# EAGLE board Q Tessel Panel (EAGLE 7.7.0)
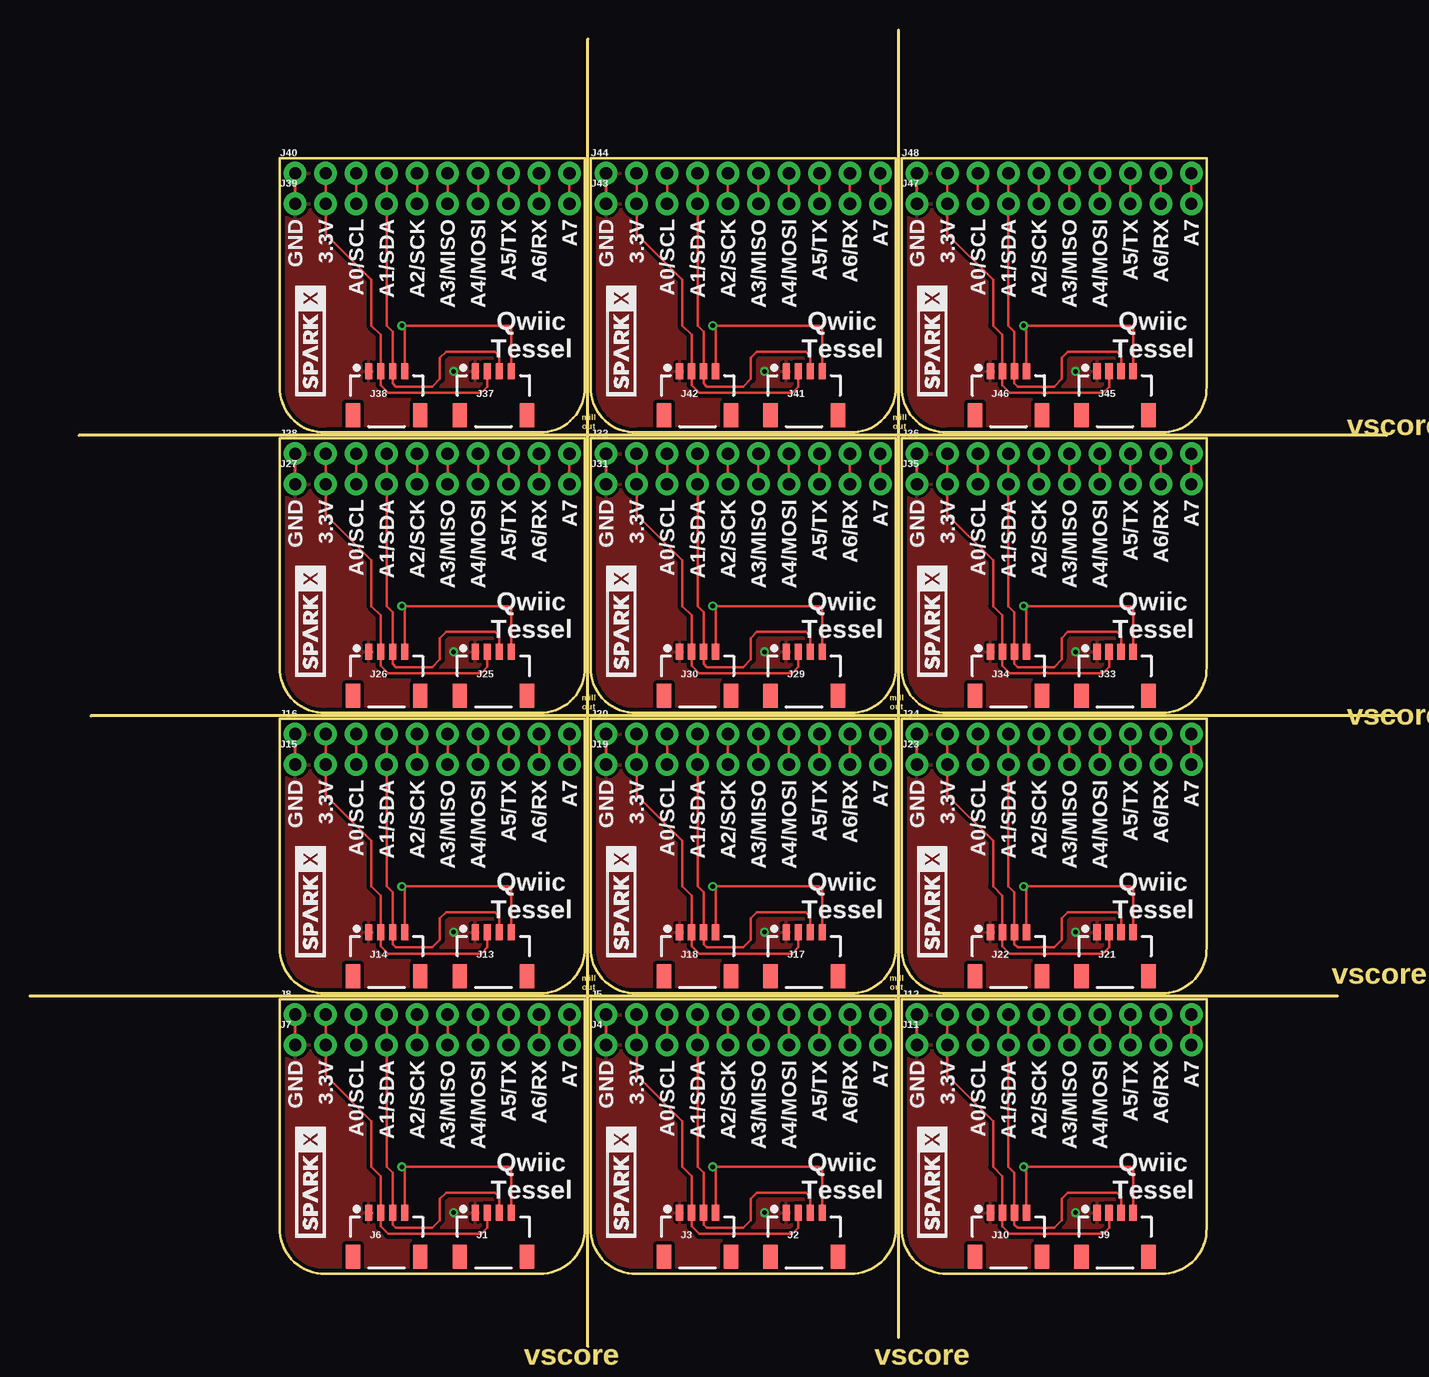
[diagram p0: board, top side]
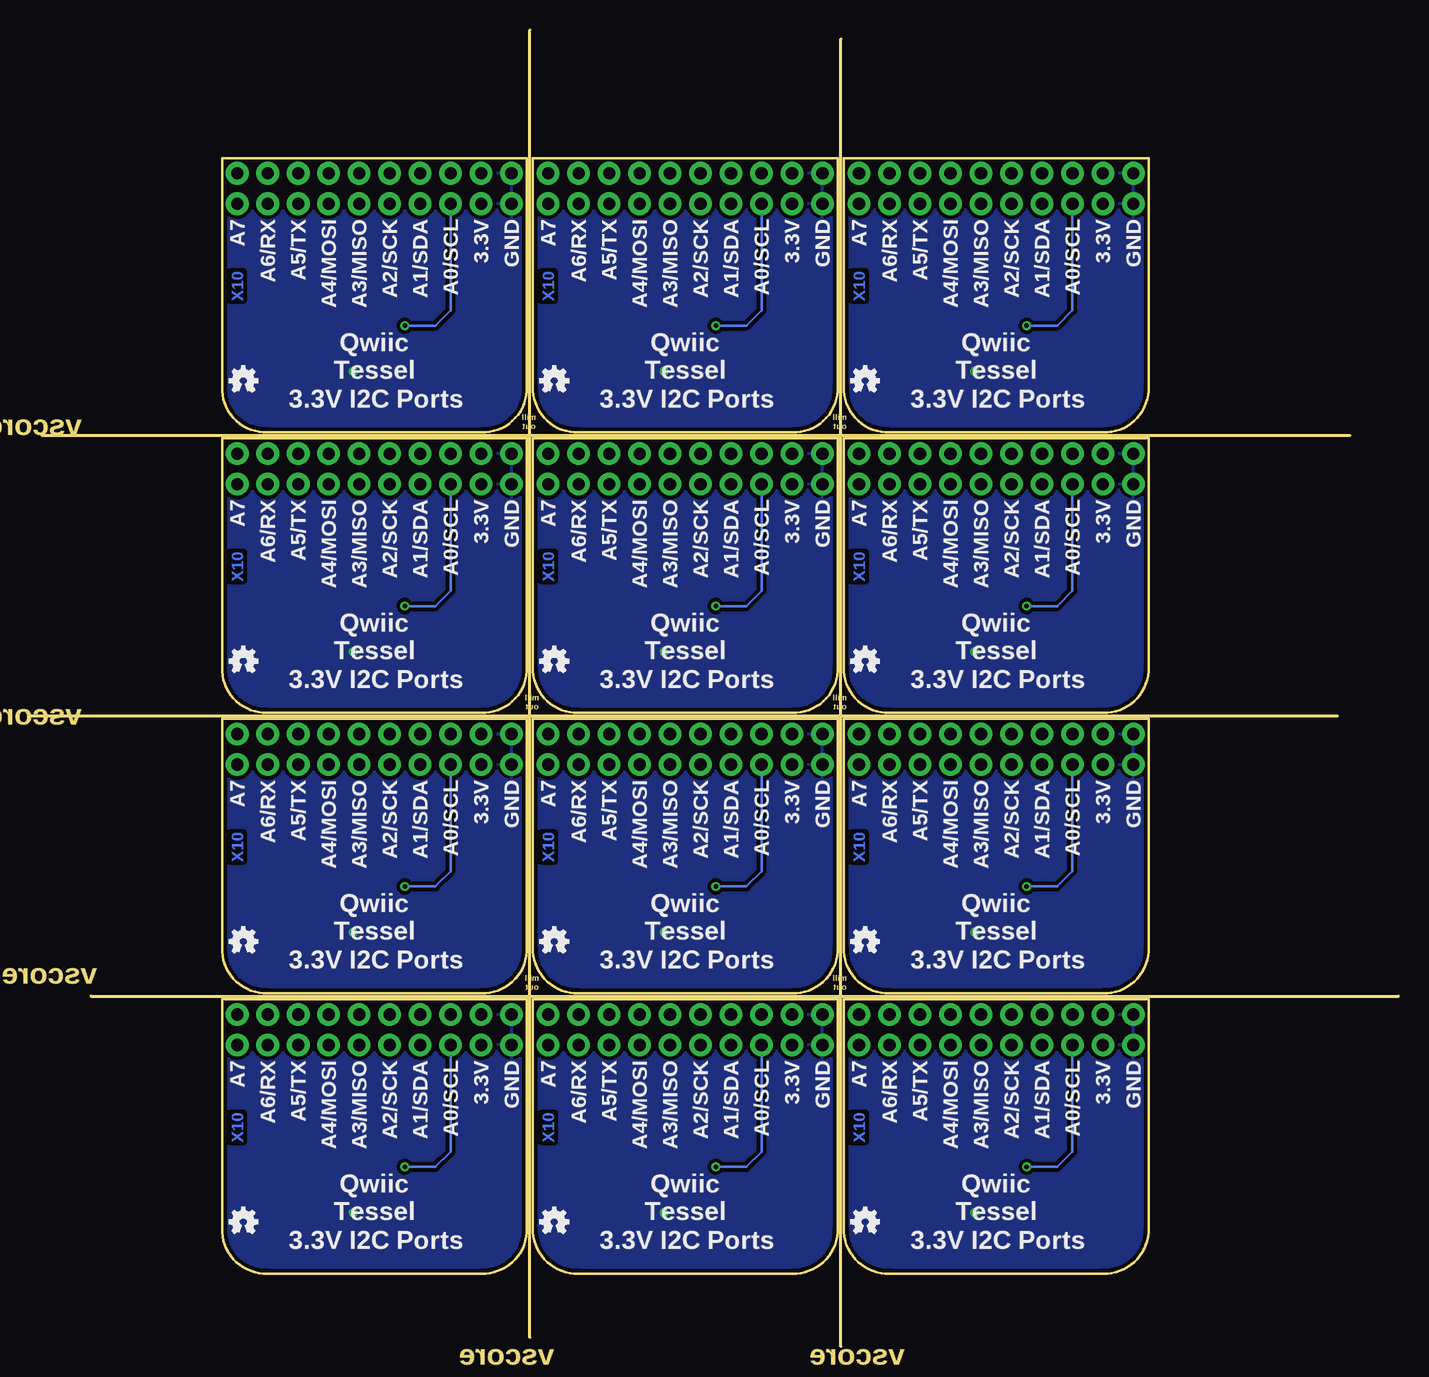
[diagram p1: board, bottom side, seen from below]

Size 114.05 x 109.73 mm. Coordinates in mm from the lower left corner, seen from the top.
Outline: 46.48,0 46.48,108.97
Outline: 72.39,0.76 72.39,109.73
Outline: 108.97,29.21 0,29.21
Outline: 114.05,52.58 5.08,52.58
Outline: 113.03,75.95 4.06,75.95
Outline: 20.83,28.96 20.83,9.91 arc94 24.64,6.1 42.42,6.1 arc94 46.23,9.91 46.23,28.96 20.83,28.96
Outline: 46.74,28.96 46.74,9.91 arc94 50.55,6.1 68.33,6.1 arc94 72.14,9.91 72.14,28.96 46.74,28.96
Outline: 72.64,28.96 72.64,9.91 arc94 76.45,6.1 94.23,6.1 arc94 98.04,9.91 98.04,28.96 72.64,28.96
Outline: 20.83,52.32 20.83,33.27 arc94 24.64,29.46 42.42,29.46 arc94 46.23,33.27 46.23,52.32 20.83,52.32
Outline: 46.74,52.32 46.74,33.27 arc94 50.55,29.46 68.33,29.46 arc94 72.14,33.27 72.14,52.32 46.74,52.32
Outline: 72.64,52.32 72.64,33.27 arc94 76.45,29.46 94.23,29.46 arc94 98.04,33.27 98.04,52.32 72.64,52.32
Outline: 20.83,75.69 20.83,56.64 arc94 24.64,52.83 42.42,52.83 arc94 46.23,56.64 46.23,75.69 20.83,75.69
Outline: 46.74,75.69 46.74,56.64 arc94 50.55,52.83 68.33,52.83 arc94 72.14,56.64 72.14,75.69 46.74,75.69
Outline: 72.64,75.69 72.64,56.64 arc94 76.45,52.83 94.23,52.83 arc94 98.04,56.64 98.04,75.69 72.64,75.69
Outline: 20.83,99.06 20.83,80.01 arc94 24.64,76.2 42.42,76.2 arc94 46.23,80.01 46.23,99.06 20.83,99.06
Outline: 46.74,99.06 46.74,80.01 arc94 50.55,76.2 68.33,76.2 arc94 72.14,80.01 72.14,99.06 46.74,99.06
Outline: 72.64,99.06 72.64,80.01 arc94 76.45,76.2 94.23,76.2 arc94 98.04,80.01 98.04,99.06 72.64,99.06
Copper layers (1*16): Top 0.035mm / dielectric 1.5mm / Bottom 0.035mm
Design rules "SparkFun-2-layer-TIGHT": minimum track width 7mil, minimum drill 15mil, track to track 7mil, track to pad 7mil, pad to pad 7mil, via to via 7mil, smd to smd 7mil, copper to edge 7mil, drill to drill 7mil, minimum pad ring 7mil, minimum via ring 7mil, stop-mask expansion 4mil, vias tented up to drill 25mil, thermal gap 10mil
Net classes: 0 Default: width 0.178 mm; 1 vcc: width 0.178 mm

## Footprints (pad centres in the part's own frame; a part is rotated, then mirrored left to right if it is on the bottom)
1X04_1MM_RA = smd 0.6 x 1.35: 1 -1.5,0; 2 -0.5,0; 3 0.5,0; 4 1.5,0 | smd 1.2 x 2: NC1 2.8,-3.675; NC2 -2.8,-3.675
1X10_NO_SILK = drill 1.016 pad 1.88: 1 0,0; 2 2.54,0; 3 5.08,0; 4 7.62,0; 5 10.16,0; 6 12.7,0; 7 15.24,0; 8 17.78,0; 9 20.32,0; 10 22.86,0

## Placement (x,y rotation side)
J1  [1X04_1MM_RA]  38.61,11.18 0 top
J2  [1X04_1MM_RA]  64.52,11.18 0 top
J3  [1X04_1MM_RA]  55.63,11.18 0 top
J4  [1X10_NO_SILK]  48.01,25.15 0 top
J5  [1X10_NO_SILK]  48.01,27.69 0 top
J6  [1X04_1MM_RA]  29.72,11.18 0 top
J7  [1X10_NO_SILK]  22.1,25.15 0 top
J8  [1X10_NO_SILK]  22.1,27.69 0 top
J9  [1X04_1MM_RA]  90.42,11.18 0 top
J10  [1X04_1MM_RA]  81.53,11.18 0 top
J11  [1X10_NO_SILK]  73.91,25.15 0 top
J12  [1X10_NO_SILK]  73.91,27.69 0 top
J13  [1X04_1MM_RA]  38.61,34.54 0 top
J14  [1X04_1MM_RA]  29.72,34.54 0 top
J15  [1X10_NO_SILK]  22.1,48.51 0 top
J16  [1X10_NO_SILK]  22.1,51.05 0 top
J17  [1X04_1MM_RA]  64.52,34.54 0 top
J18  [1X04_1MM_RA]  55.63,34.54 0 top
J19  [1X10_NO_SILK]  48.01,48.51 0 top
J20  [1X10_NO_SILK]  48.01,51.05 0 top
J21  [1X04_1MM_RA]  90.42,34.54 0 top
J22  [1X04_1MM_RA]  81.53,34.54 0 top
J23  [1X10_NO_SILK]  73.91,48.51 0 top
J24  [1X10_NO_SILK]  73.91,51.05 0 top
J25  [1X04_1MM_RA]  38.61,57.91 0 top
J26  [1X04_1MM_RA]  29.72,57.91 0 top
J27  [1X10_NO_SILK]  22.1,71.88 0 top
J28  [1X10_NO_SILK]  22.1,74.42 0 top
J29  [1X04_1MM_RA]  64.52,57.91 0 top
J30  [1X04_1MM_RA]  55.63,57.91 0 top
J31  [1X10_NO_SILK]  48.01,71.88 0 top
J32  [1X10_NO_SILK]  48.01,74.42 0 top
J33  [1X04_1MM_RA]  90.42,57.91 0 top
J34  [1X04_1MM_RA]  81.53,57.91 0 top
J35  [1X10_NO_SILK]  73.91,71.88 0 top
J36  [1X10_NO_SILK]  73.91,74.42 0 top
J37  [1X04_1MM_RA]  38.61,81.28 0 top
J38  [1X04_1MM_RA]  29.72,81.28 0 top
J39  [1X10_NO_SILK]  22.1,95.25 0 top
J40  [1X10_NO_SILK]  22.1,97.79 0 top
J41  [1X04_1MM_RA]  64.52,81.28 0 top
J42  [1X04_1MM_RA]  55.63,81.28 0 top
J43  [1X10_NO_SILK]  48.01,95.25 0 top
J44  [1X10_NO_SILK]  48.01,97.79 0 top
J45  [1X04_1MM_RA]  90.42,81.28 0 top
J46  [1X04_1MM_RA]  81.53,81.28 0 top
J47  [1X10_NO_SILK]  73.91,95.25 0 top
J48  [1X10_NO_SILK]  73.91,97.79 0 top
LOGO1  OSHW-LOGOMINI  [OSHW-LOGO-MINI]  44.45,10.41 0 bottom
LOGO2  OSHW-LOGOMINI  [OSHW-LOGO-MINI]  70.36,10.41 0 bottom
LOGO3  OSHW-LOGOMINI  [OSHW-LOGO-MINI]  96.27,10.41 0 bottom
LOGO4  OSHW-LOGOMINI  [OSHW-LOGO-MINI]  44.45,33.78 0 bottom
LOGO5  OSHW-LOGOMINI  [OSHW-LOGO-MINI]  70.36,33.78 0 bottom
LOGO6  OSHW-LOGOMINI  [OSHW-LOGO-MINI]  96.27,33.78 0 bottom
LOGO7  OSHW-LOGOMINI  [OSHW-LOGO-MINI]  44.45,57.15 0 bottom
LOGO8  OSHW-LOGOMINI  [OSHW-LOGO-MINI]  70.36,57.15 0 bottom
LOGO9  OSHW-LOGOMINI  [OSHW-LOGO-MINI]  96.27,57.15 0 bottom
LOGO10  OSHW-LOGOMINI  [OSHW-LOGO-MINI]  44.45,80.52 0 bottom
LOGO11  OSHW-LOGOMINI  [OSHW-LOGO-MINI]  70.36,80.52 0 bottom
LOGO12  OSHW-LOGOMINI  [OSHW-LOGO-MINI]  96.27,80.52 0 bottom
U$1  SPARKX-LOGO4  [SPARKX-MEDIUM]  49.28,13.72 90 top
U$2  SPARKX-LOGO4  [SPARKX-MEDIUM]  23.37,13.72 90 top
U$3  SPARKX-LOGO4  [SPARKX-MEDIUM]  75.18,13.72 90 top
U$4  SPARKX-LOGO4  [SPARKX-MEDIUM]  23.37,37.08 90 top
U$5  SPARKX-LOGO4  [SPARKX-MEDIUM]  49.28,37.08 90 top
U$6  SPARKX-LOGO4  [SPARKX-MEDIUM]  75.18,37.08 90 top
U$7  SPARKX-LOGO4  [SPARKX-MEDIUM]  23.37,60.45 90 top
U$8  SPARKX-LOGO4  [SPARKX-MEDIUM]  49.28,60.45 90 top
U$9  SPARKX-LOGO4  [SPARKX-MEDIUM]  75.18,60.45 90 top
U$10  SPARKX-LOGO4  [SPARKX-MEDIUM]  23.37,83.82 90 top
U$11  SPARKX-LOGO4  [SPARKX-MEDIUM]  49.28,83.82 90 top
U$12  SPARKX-LOGO4  [SPARKX-MEDIUM]  75.18,83.82 90 top

## Library data of the parts
J1-J3 J6 J9 J10 J13 J14 J17 J18 J21 J22 J25 J26 J29 J30 J33 J34 J37 J38 J41 J42 J45 J46 U$1-U$12 = SparkX
J4 J5 J7 J8 J11 J12 J15 J16 J19 J20 J23 J24 J27 J28 J31 J32 J35 J36 J39 J40 J43 J44 J47 J48 = SparkFun-Connectors; PROD_ID: CONN-11563
LOGO1-LOGO12 = SparkFun-Aesthetics

## Nets
3.3V: J1.2 J6.2 J7.2 J8.2
3.3V1: J2.2 J3.2 J4.2 J5.2
3.3V2: J9.2 J10.2 J11.2 J12.2
3.3V3: J13.2 J14.2 J15.2 J16.2
3.3V4: J17.2 J18.2 J19.2 J20.2
3.3V5: J21.2 J22.2 J23.2 J24.2
3.3V6: J25.2 J26.2 J27.2 J28.2
3.3V7: J29.2 J30.2 J31.2 J32.2
3.3V8: J33.2 J34.2 J35.2 J36.2
3.3V9: J37.2 J38.2 J39.2 J40.2
3.3V10: J41.2 J42.2 J43.2 J44.2
3.3V11: J45.2 J46.2 J47.2 J48.2
A0/SCL: J1.4 J6.4 J7.3 J8.3
A0/SCL1: J2.4 J3.4 J4.3 J5.3
A0/SCL2: J9.4 J10.4 J11.3 J12.3
A0/SCL3: J13.4 J14.4 J15.3 J16.3
A0/SCL4: J17.4 J18.4 J19.3 J20.3
A0/SCL5: J21.4 J22.4 J23.3 J24.3
A0/SCL6: J25.4 J26.4 J27.3 J28.3
A0/SCL7: J29.4 J30.4 J31.3 J32.3
A0/SCL8: J33.4 J34.4 J35.3 J36.3
A0/SCL9: J37.4 J38.4 J39.3 J40.3
A0/SCL10: J41.4 J42.4 J43.3 J44.3
A0/SCL11: J45.4 J46.4 J47.3 J48.3
A1: J4.10 J5.10
A1/SDA: J1.3 J6.3 J7.4 J8.4
A1/SDA1: J2.3 J3.3 J4.4 J5.4
A1/SDA2: J9.3 J10.3 J11.4 J12.4
A1/SDA3: J13.3 J14.3 J15.4 J16.4
A1/SDA4: J17.3 J18.3 J19.4 J20.4
A1/SDA5: J21.3 J22.3 J23.4 J24.4
A1/SDA6: J25.3 J26.3 J27.4 J28.4
A1/SDA7: J29.3 J30.3 J31.4 J32.4
A1/SDA8: J33.3 J34.3 J35.4 J36.4
A1/SDA9: J37.3 J38.3 J39.4 J40.4
A1/SDA10: J41.3 J42.3 J43.4 J44.4
A1/SDA11: J45.3 J46.3 J47.4 J48.4
A2: J11.10 J12.10
A2/SCK: J7.5 J8.5
A2/SCK1: J4.5 J5.5
A2/SCK2: J11.5 J12.5
A2/SCK3: J15.5 J16.5
A2/SCK4: J19.5 J20.5
A2/SCK5: J23.5 J24.5
A2/SCK6: J27.5 J28.5
A2/SCK7: J31.5 J32.5
A2/SCK8: J35.5 J36.5
A2/SCK9: J39.5 J40.5
A2/SCK10: J43.5 J44.5
A2/SCK11: J47.5 J48.5
A3: J15.10 J16.10
A3/MISO: J7.6 J8.6
A3/MISO1: J4.6 J5.6
A3/MISO2: J11.6 J12.6
A3/MISO3: J15.6 J16.6
A3/MISO4: J19.6 J20.6
A3/MISO5: J23.6 J24.6
A3/MISO6: J27.6 J28.6
A3/MISO7: J31.6 J32.6
A3/MISO8: J35.6 J36.6
A3/MISO9: J39.6 J40.6
A3/MISO10: J43.6 J44.6
A3/MISO11: J47.6 J48.6
A4: J19.10 J20.10
A4/MOSI: J7.7 J8.7
A4/MOSI1: J4.7 J5.7
A4/MOSI2: J11.7 J12.7
A4/MOSI3: J15.7 J16.7
A4/MOSI4: J19.7 J20.7
A4/MOSI5: J23.7 J24.7
A4/MOSI6: J27.7 J28.7
A4/MOSI7: J31.7 J32.7
A4/MOSI8: J35.7 J36.7
A4/MOSI9: J39.7 J40.7
A4/MOSI10: J43.7 J44.7
A4/MOSI11: J47.7 J48.7
A5: J23.10 J24.10
A5/TX: J7.8 J8.8
A5/TX1: J4.8 J5.8
A5/TX2: J11.8 J12.8
A5/TX3: J15.8 J16.8
A5/TX4: J19.8 J20.8
A5/TX5: J23.8 J24.8
A5/TX6: J27.8 J28.8
A5/TX7: J31.8 J32.8
A5/TX8: J35.8 J36.8
A5/TX9: J39.8 J40.8
A5/TX10: J43.8 J44.8
A5/TX11: J47.8 J48.8
A6: J27.10 J28.10
A6/RX: J7.9 J8.9
A6/RX1: J4.9 J5.9
A6/RX2: J11.9 J12.9
A6/RX3: J15.9 J16.9
A6/RX4: J19.9 J20.9
A6/RX5: J23.9 J24.9
A6/RX6: J27.9 J28.9
A6/RX7: J31.9 J32.9
A6/RX8: J35.9 J36.9
A6/RX9: J39.9 J40.9
A6/RX10: J43.9 J44.9
A6/RX11: J47.9 J48.9
A7: J7.10 J8.10
A8: J31.10 J32.10
A9: J35.10 J36.10
A10: J39.10 J40.10
A11: J43.10 J44.10
A12: J47.10 J48.10
GND [vcc]: J1.1 J6.1 J7.1 J8.1
GND1 [vcc]: J2.1 J3.1 J4.1 J5.1
GND2 [vcc]: J9.1 J10.1 J11.1 J12.1
GND3 [vcc]: J13.1 J14.1 J15.1 J16.1
GND4 [vcc]: J17.1 J18.1 J19.1 J20.1
GND5 [vcc]: J21.1 J22.1 J23.1 J24.1
GND6 [vcc]: J25.1 J26.1 J27.1 J28.1
GND7 [vcc]: J29.1 J30.1 J31.1 J32.1
GND8 [vcc]: J33.1 J34.1 J35.1 J36.1
GND9 [vcc]: J37.1 J38.1 J39.1 J40.1
GND10 [vcc]: J41.1 J42.1 J43.1 J44.1
GND11 [vcc]: J45.1 J46.1 J47.1 J48.1

## Tracks (layer width: path | path; a pad name or v marks a point on that pad's centre or on a via)
3.3V
  Top 0.203: J8.2 J7.2 24.64,22.61 28.45,18.8 28.45,14.99 29.22,14.22 J6.2 29.22,10.03 29.84,9.4 37.59,9.4 38.11,9.91 J1.2
3.3V1
  Top 0.203: J5.2 J4.2 50.55,22.61 54.36,18.8 54.36,14.99 55.13,14.22 J3.2 55.13,10.03 55.75,9.4 63.5,9.4 64.02,9.91 J2.2
3.3V2
  Top 0.203: J12.2 J11.2 76.45,22.61 80.26,18.8 80.26,14.99 81.03,14.22 J10.2 81.03,10.03 81.66,9.4 89.41,9.4 89.92,9.91 J9.2
3.3V3
  Top 0.203: J16.2 J15.2 24.64,45.97 28.45,42.16 28.45,38.35 29.22,37.58 J14.2 29.22,33.39 29.84,32.77 37.59,32.77 38.11,33.28 J13.2
3.3V4
  Top 0.203: J20.2 J19.2 50.55,45.97 54.36,42.16 54.36,38.35 55.13,37.58 J18.2 55.13,33.39 55.75,32.77 63.5,32.77 64.02,33.28 J17.2
3.3V5
  Top 0.203: J24.2 J23.2 76.45,45.97 80.26,42.16 80.26,38.35 81.03,37.58 J22.2 81.03,33.39 81.66,32.77 89.41,32.77 89.92,33.28 J21.2
3.3V6
  Top 0.203: J28.2 J27.2 24.64,69.34 28.45,65.53 28.45,61.72 29.22,60.95 J26.2 29.22,56.76 29.84,56.13 37.59,56.13 38.11,56.65 J25.2
3.3V7
  Top 0.203: J32.2 J31.2 50.55,69.34 54.36,65.53 54.36,61.72 55.13,60.95 J30.2 55.13,56.76 55.75,56.13 63.5,56.13 64.02,56.65 J29.2
3.3V8
  Top 0.203: J36.2 J35.2 76.45,69.34 80.26,65.53 80.26,61.72 81.03,60.95 J34.2 81.03,56.76 81.66,56.13 89.41,56.13 89.92,56.65 J33.2
3.3V9
  Top 0.203: J40.2 J39.2 24.64,92.71 28.45,88.9 28.45,85.09 29.22,84.32 J38.2 29.22,80.13 29.84,79.5 37.59,79.5 38.11,80.02 J37.2
3.3V10
  Top 0.203: J44.2 J43.2 50.55,92.71 54.36,88.9 54.36,85.09 55.13,84.32 J42.2 55.13,80.13 55.75,79.5 63.5,79.5 64.02,80.02 J41.2
3.3V11
  Top 0.203: J48.2 J47.2 76.45,92.71 80.26,88.9 80.26,85.09 81.03,84.32 J46.2 81.03,80.13 81.66,79.5 89.41,79.5 89.92,80.02 J45.2
A0/SCL  (via drill 0.38)
  Top 0.203: J8.3 J7.3 | J6.4 31.22,14.76 v30.99,14.99 39.88,14.99 40.11,14.76 J1.4
  Bottom 0.203: v30.99,14.99 28.45,14.99 27.18,16.26 J7.3
A0/SCL1  (via drill 0.38)
  Top 0.203: J5.3 J4.3 | J3.4 57.13,14.76 v56.9,14.99 65.79,14.99 66.02,14.76 J2.4
  Bottom 0.203: v56.9,14.99 54.36,14.99 53.09,16.26 J4.3
A0/SCL2  (via drill 0.38)
  Top 0.203: J12.3 J11.3 | J10.4 83.03,14.76 v82.8,14.99 91.69,14.99 91.92,14.76 J9.4
  Bottom 0.203: v82.8,14.99 80.26,14.99 78.99,16.26 J11.3
A0/SCL3  (via drill 0.38)
  Top 0.203: J16.3 J15.3 | J14.4 31.22,38.12 v30.99,38.35 39.88,38.35 40.11,38.12 J13.4
  Bottom 0.203: v30.99,38.35 28.45,38.35 27.18,39.62 J15.3
A0/SCL4  (via drill 0.38)
  Top 0.203: J20.3 J19.3 | J18.4 57.13,38.12 v56.9,38.35 65.79,38.35 66.02,38.12 J17.4
  Bottom 0.203: v56.9,38.35 54.36,38.35 53.09,39.62 J19.3
A0/SCL5  (via drill 0.38)
  Top 0.203: J24.3 J23.3 | J22.4 83.03,38.12 v82.8,38.35 91.69,38.35 91.92,38.12 J21.4
  Bottom 0.203: v82.8,38.35 80.26,38.35 78.99,39.62 J23.3
A0/SCL6  (via drill 0.38)
  Top 0.203: J28.3 J27.3 | J26.4 31.22,61.49 v30.99,61.72 39.88,61.72 40.11,61.49 J25.4
  Bottom 0.203: v30.99,61.72 28.45,61.72 27.18,62.99 J27.3
A0/SCL7  (via drill 0.38)
  Top 0.203: J32.3 J31.3 | J30.4 57.13,61.49 v56.9,61.72 65.79,61.72 66.02,61.49 J29.4
  Bottom 0.203: v56.9,61.72 54.36,61.72 53.09,62.99 J31.3
A0/SCL8  (via drill 0.38)
  Top 0.203: J36.3 J35.3 | J34.4 83.03,61.49 v82.8,61.72 91.69,61.72 91.92,61.49 J33.4
  Bottom 0.203: v82.8,61.72 80.26,61.72 78.99,62.99 J35.3
A0/SCL9  (via drill 0.38)
  Top 0.203: J40.3 J39.3 | J38.4 31.22,84.86 v30.99,85.09 39.88,85.09 40.11,84.86 J37.4
  Bottom 0.203: v30.99,85.09 28.45,85.09 27.18,86.36 J39.3
A0/SCL10  (via drill 0.38)
  Top 0.203: J44.3 J43.3 | J42.4 57.13,84.86 v56.9,85.09 65.79,85.09 66.02,84.86 J41.4
  Bottom 0.203: v56.9,85.09 54.36,85.09 53.09,86.36 J43.3
A0/SCL11  (via drill 0.38)
  Top 0.203: J48.3 J47.3 | J46.4 83.03,84.86 v82.8,85.09 91.69,85.09 91.92,84.86 J45.4
  Bottom 0.203: v82.8,85.09 80.26,85.09 78.99,86.36 J47.3
A1
  Top 0.203: J5.10 J4.10
A1/SDA
  Top 0.203: J8.4 J7.4 29.72,14.99 30.22,14.49 J6.3 30.22,10.17 30.48,9.91 33.53,9.91 34.16,10.54 34.16,12.32 34.67,12.83 38.73,12.83 39.11,12.45 J1.3
A1/SDA1
  Top 0.203: J5.4 J4.4 55.63,14.99 56.13,14.49 J3.3 56.13,10.17 56.39,9.91 59.44,9.91 60.07,10.54 60.07,12.32 60.58,12.83 64.64,12.83 65.02,12.45 J2.3
A1/SDA2
  Top 0.203: J12.4 J11.4 81.53,14.99 82.03,14.49 J10.3 82.03,10.17 82.3,9.91 85.34,9.91 85.98,10.54 85.98,12.32 86.49,12.83 90.55,12.83 90.92,12.45 J9.3
A1/SDA3
  Top 0.203: J16.4 J15.4 29.72,38.35 30.22,37.85 J14.3 30.22,33.54 30.48,33.27 33.53,33.27 34.16,33.91 34.16,35.69 34.67,36.2 38.73,36.2 39.11,35.82 J13.3
A1/SDA4
  Top 0.203: J20.4 J19.4 55.63,38.35 56.13,37.85 J18.3 56.13,33.54 56.39,33.27 59.44,33.27 60.07,33.91 60.07,35.69 60.58,36.2 64.64,36.2 65.02,35.82 J17.3
A1/SDA5
  Top 0.203: J24.4 J23.4 81.53,38.35 82.03,37.85 J22.3 82.03,33.54 82.3,33.27 85.34,33.27 85.98,33.91 85.98,35.69 86.49,36.2 90.55,36.2 90.92,35.82 J21.3
A1/SDA6
  Top 0.203: J28.4 J27.4 29.72,61.72 30.22,61.22 J26.3 30.22,56.9 30.48,56.64 33.53,56.64 34.16,57.28 34.16,59.06 34.67,59.56 38.73,59.56 39.11,59.19 J25.3
A1/SDA7
  Top 0.203: J32.4 J31.4 55.63,61.72 56.13,61.22 J30.3 56.13,56.9 56.39,56.64 59.44,56.64 60.07,57.28 60.07,59.06 60.58,59.56 64.64,59.56 65.02,59.19 J29.3
A1/SDA8
  Top 0.203: J36.4 J35.4 81.53,61.72 82.03,61.22 J34.3 82.03,56.9 82.3,56.64 85.34,56.64 85.98,57.28 85.98,59.06 86.49,59.56 90.55,59.56 90.92,59.19 J33.3
A1/SDA9
  Top 0.203: J40.4 J39.4 29.72,85.09 30.22,84.59 J38.3 30.22,80.27 30.48,80.01 33.53,80.01 34.16,80.65 34.16,82.42 34.67,82.93 38.73,82.93 39.11,82.56 J37.3
A1/SDA10
  Top 0.203: J44.4 J43.4 55.63,85.09 56.13,84.59 J42.3 56.13,80.27 56.39,80.01 59.44,80.01 60.07,80.65 60.07,82.42 60.58,82.93 64.64,82.93 65.02,82.56 J41.3
A1/SDA11
  Top 0.203: J48.4 J47.4 81.53,85.09 82.03,84.59 J46.3 82.03,80.27 82.3,80.01 85.34,80.01 85.98,80.65 85.98,82.42 86.49,82.93 90.55,82.93 90.92,82.56 J45.3
A2
  Top 0.203: J12.10 J11.10
A2/SCK
  Top 0.203: J8.5 J7.5
A2/SCK1
  Top 0.203: J5.5 J4.5
A2/SCK2
  Top 0.203: J12.5 J11.5
A2/SCK3
  Top 0.203: J16.5 J15.5
A2/SCK4
  Top 0.203: J20.5 J19.5
A2/SCK5
  Top 0.203: J24.5 J23.5
A2/SCK6
  Top 0.203: J28.5 J27.5
A2/SCK7
  Top 0.203: J32.5 J31.5
A2/SCK8
  Top 0.203: J36.5 J35.5
A2/SCK9
  Top 0.203: J40.5 J39.5
A2/SCK10
  Top 0.203: J44.5 J43.5
A2/SCK11
  Top 0.203: J48.5 J47.5
A3
  Top 0.203: J16.10 J15.10
A3/MISO
  Top 0.203: J8.6 J7.6
A3/MISO1
  Top 0.203: J5.6 J4.6
A3/MISO2
  Top 0.203: J12.6 J11.6
A3/MISO3
  Top 0.203: J16.6 J15.6
A3/MISO4
  Top 0.203: J20.6 J19.6
A3/MISO5
  Top 0.203: J24.6 J23.6
A3/MISO6
  Top 0.203: J28.6 J27.6
A3/MISO7
  Top 0.203: J32.6 J31.6
A3/MISO8
  Top 0.203: J36.6 J35.6
A3/MISO9
  Top 0.203: J40.6 J39.6
A3/MISO10
  Top 0.203: J44.6 J43.6
A3/MISO11
  Top 0.203: J48.6 J47.6
A4
  Top 0.203: J20.10 J19.10
A4/MOSI
  Top 0.203: J8.7 J7.7
A4/MOSI1
  Top 0.203: J5.7 J4.7
A4/MOSI2
  Top 0.203: J12.7 J11.7
A4/MOSI3
  Top 0.203: J16.7 J15.7
A4/MOSI4
  Top 0.203: J20.7 J19.7
A4/MOSI5
  Top 0.203: J24.7 J23.7
A4/MOSI6
  Top 0.203: J28.7 J27.7
A4/MOSI7
  Top 0.203: J32.7 J31.7
A4/MOSI8
  Top 0.203: J36.7 J35.7
A4/MOSI9
  Top 0.203: J40.7 J39.7
A4/MOSI10
  Top 0.203: J44.7 J43.7
A4/MOSI11
  Top 0.203: J48.7 J47.7
A5
  Top 0.203: J24.10 J23.10
A5/TX
  Top 0.203: J8.8 J7.8
A5/TX1
  Top 0.203: J5.8 J4.8
A5/TX2
  Top 0.203: J12.8 J11.8
A5/TX3
  Top 0.203: J16.8 J15.8
A5/TX4
  Top 0.203: J20.8 J19.8
A5/TX5
  Top 0.203: J24.8 J23.8
A5/TX6
  Top 0.203: J28.8 J27.8
A5/TX7
  Top 0.203: J32.8 J31.8
A5/TX8
  Top 0.203: J36.8 J35.8
A5/TX9
  Top 0.203: J40.8 J39.8
A5/TX10
  Top 0.203: J44.8 J43.8
A5/TX11
  Top 0.203: J48.8 J47.8
A6
  Top 0.203: J28.10 J27.10
A6/RX
  Top 0.203: J8.9 J7.9
A6/RX1
  Top 0.203: J5.9 J4.9
A6/RX2
  Top 0.203: J12.9 J11.9
A6/RX3
  Top 0.203: J16.9 J15.9
A6/RX4
  Top 0.203: J20.9 J19.9
A6/RX5
  Top 0.203: J24.9 J23.9
A6/RX6
  Top 0.203: J28.9 J27.9
A6/RX7
  Top 0.203: J32.9 J31.9
A6/RX8
  Top 0.203: J36.9 J35.9
A6/RX9
  Top 0.203: J40.9 J39.9
A6/RX10
  Top 0.203: J44.9 J43.9
A6/RX11
  Top 0.203: J48.9 J47.9
A7
  Top 0.203: J8.10 J7.10
A8
  Top 0.203: J32.10 J31.10
A9
  Top 0.203: J36.10 J35.10
A10
  Top 0.203: J40.10 J39.10
A11
  Top 0.203: J44.10 J43.10
A12
  Top 0.203: J48.10 J47.10
GND  (via drill 0.38)
  Top 0.203: J8.1 J7.1
  other vias: 35.31,11.18
  pour Top (isolate 0.305): 20.83,28.96 46.23,28.96 46.23,6.1 20.83,6.1
  pour Bottom (isolate 0.305): 20.83,28.96 46.23,28.96 46.23,6.1 20.83,6.1
GND1  (via drill 0.38)
  Top 0.203: J5.1 J4.1
  other vias: 61.21,11.18
  pour Top (isolate 0.305): 46.74,28.96 72.14,28.96 72.14,6.1 46.74,6.1
  pour Bottom (isolate 0.305): 46.74,28.96 72.14,28.96 72.14,6.1 46.74,6.1
GND2  (via drill 0.38)
  Top 0.203: J12.1 J11.1
  other vias: 87.12,11.18
  pour Top (isolate 0.305): 72.64,28.96 98.04,28.96 98.04,6.1 72.64,6.1
  pour Bottom (isolate 0.305): 72.64,28.96 98.04,28.96 98.04,6.1 72.64,6.1
GND3  (via drill 0.38)
  Top 0.203: J16.1 J15.1
  other vias: 35.31,34.54
  pour Top (isolate 0.305): 20.83,52.32 46.23,52.32 46.23,29.46 20.83,29.46
  pour Bottom (isolate 0.305): 20.83,52.32 46.23,52.32 46.23,29.46 20.83,29.46
GND4  (via drill 0.38)
  Top 0.203: J20.1 J19.1
  other vias: 61.21,34.54
  pour Top (isolate 0.305): 46.74,52.32 72.14,52.32 72.14,29.46 46.74,29.46
  pour Bottom (isolate 0.305): 46.74,52.32 72.14,52.32 72.14,29.46 46.74,29.46
GND5  (via drill 0.38)
  Top 0.203: J24.1 J23.1
  other vias: 87.12,34.54
  pour Top (isolate 0.305): 72.64,52.32 98.04,52.32 98.04,29.46 72.64,29.46
  pour Bottom (isolate 0.305): 72.64,52.32 98.04,52.32 98.04,29.46 72.64,29.46
GND6  (via drill 0.38)
  Top 0.203: J28.1 J27.1
  other vias: 35.31,57.91
  pour Top (isolate 0.305): 20.83,75.69 46.23,75.69 46.23,52.83 20.83,52.83
  pour Bottom (isolate 0.305): 20.83,75.69 46.23,75.69 46.23,52.83 20.83,52.83
GND7  (via drill 0.38)
  Top 0.203: J32.1 J31.1
  other vias: 61.21,57.91
  pour Top (isolate 0.305): 46.74,75.69 72.14,75.69 72.14,52.83 46.74,52.83
  pour Bottom (isolate 0.305): 46.74,75.69 72.14,75.69 72.14,52.83 46.74,52.83
GND8  (via drill 0.38)
  Top 0.203: J36.1 J35.1
  other vias: 87.12,57.91
  pour Top (isolate 0.305): 72.64,75.69 98.04,75.69 98.04,52.83 72.64,52.83
  pour Bottom (isolate 0.305): 72.64,75.69 98.04,75.69 98.04,52.83 72.64,52.83
GND9  (via drill 0.38)
  Top 0.203: J40.1 J39.1
  other vias: 35.31,81.28
  pour Top (isolate 0.305): 20.83,99.06 46.23,99.06 46.23,76.2 20.83,76.2
  pour Bottom (isolate 0.305): 20.83,99.06 46.23,99.06 46.23,76.2 20.83,76.2
GND10  (via drill 0.38)
  Top 0.203: J44.1 J43.1
  other vias: 61.21,81.28
  pour Top (isolate 0.305): 46.74,99.06 72.14,99.06 72.14,76.2 46.74,76.2
  pour Bottom (isolate 0.305): 46.74,99.06 72.14,99.06 72.14,76.2 46.74,76.2
GND11  (via drill 0.38)
  Top 0.203: J48.1 J47.1
  other vias: 87.12,81.28
  pour Top (isolate 0.305): 72.64,99.06 98.04,99.06 98.04,76.2 72.64,76.2
  pour Bottom (isolate 0.305): 72.64,99.06 98.04,99.06 98.04,76.2 72.64,76.2

## Text on the board
Bottom: X10 | X10 | X10 | X10 | X10 | X10 | X10 | X10 | X10 | X10 | X10 | X10
Dimension: mill / out | mill / out | vscore | mill / out | mill / out | vscore | mill / out | mill / out | vscore | vscore | vscore
tPlace: GND | 3.3V | A0/SCL | A1/SDA | A2/SCK | A3/MISO | A4/MOSI | A5/TX | A6/RX | A7 | GND | 3.3V | A0/SCL | A1/SDA | A2/SCK | A3/MISO | A4/MOSI | A5/TX | A6/RX | A7 | GND | 3.3V | A0/SCL | A1/SDA | A2/SCK | A3/MISO | A4/MOSI | A5/TX | A6/RX | A7 | Qwiic / Tessel | Qwiic / Tessel | Qwiic / Tessel | GND | 3.3V | A0/SCL | A1/SDA | A2/SCK | A3/MISO | A4/MOSI | A5/TX | A6/RX | A7 | GND | 3.3V | A0/SCL | A1/SDA | A2/SCK | A3/MISO | A4/MOSI | A5/TX | A6/RX | A7 | GND | 3.3V | A0/SCL | A1/SDA | A2/SCK | A3/MISO | A4/MOSI | A5/TX | A6/RX | A7 | Qwiic / Tessel | Qwiic / Tessel | Qwiic / Tessel | GND | 3.3V | A0/SCL | A1/SDA | A2/SCK | A3/MISO | A4/MOSI | A5/TX | A6/RX | A7 | GND | 3.3V | A0/SCL | A1/SDA | A2/SCK | A3/MISO | A4/MOSI | A5/TX | A6/RX | A7 | GND | 3.3V | A0/SCL | A1/SDA | A2/SCK | A3/MISO | A4/MOSI | A5/TX | A6/RX | A7 | Qwiic / Tessel | Qwiic / Tessel | Qwiic / Tessel | GND | 3.3V | A0/SCL | A1/SDA | A2/SCK | A3/MISO | A4/MOSI | A5/TX | A6/RX | A7 | GND | 3.3V | A0/SCL | A1/SDA | A2/SCK | A3/MISO | A4/MOSI | A5/TX | A6/RX | A7 | GND | 3.3V | A0/SCL | A1/SDA | A2/SCK | A3/MISO | A4/MOSI | A5/TX | A6/RX | A7 | Qwiic / Tessel | Qwiic / Tessel | Qwiic / Tessel
bPlace: GND | 3.3V | A0/SCL | A1/SDA | A2/SCK | A3/MISO | A4/MOSI | A5/TX | A6/RX | A7 | GND | 3.3V | A0/SCL | A1/SDA | A2/SCK | A3/MISO | A4/MOSI | A5/TX | A6/RX | A7 | GND | 3.3V | A0/SCL | A1/SDA | A2/SCK | A3/MISO | A4/MOSI | A5/TX | A6/RX | A7 | Qwiic / Tessel | Qwiic / Tessel | Qwiic / Tessel | 3.3V I2C Ports | 3.3V I2C Ports | 3.3V I2C Ports | GND | 3.3V | A0/SCL | A1/SDA | A2/SCK | A3/MISO | A4/MOSI | A5/TX | A6/RX | A7 | GND | 3.3V | A0/SCL | A1/SDA | A2/SCK | A3/MISO | A4/MOSI | A5/TX | A6/RX | A7 | GND | 3.3V | A0/SCL | A1/SDA | A2/SCK | A3/MISO | A4/MOSI | A5/TX | A6/RX | A7 | Qwiic / Tessel | Qwiic / Tessel | Qwiic / Tessel | 3.3V I2C Ports | 3.3V I2C Ports | 3.3V I2C Ports | GND | 3.3V | A0/SCL | A1/SDA | A2/SCK | A3/MISO | A4/MOSI | A5/TX | A6/RX | A7 | GND | 3.3V | A0/SCL | A1/SDA | A2/SCK | A3/MISO | A4/MOSI | A5/TX | A6/RX | A7 | GND | 3.3V | A0/SCL | A1/SDA | A2/SCK | A3/MISO | A4/MOSI | A5/TX | A6/RX | A7 | Qwiic / Tessel | Qwiic / Tessel | Qwiic / Tessel | 3.3V I2C Ports | 3.3V I2C Ports | 3.3V I2C Ports | GND | 3.3V | A0/SCL | A1/SDA | A2/SCK | A3/MISO | A4/MOSI | A5/TX | A6/RX | A7 | GND | 3.3V | A0/SCL | A1/SDA | A2/SCK | A3/MISO | A4/MOSI | A5/TX | A6/RX | A7 | GND | 3.3V | A0/SCL | A1/SDA | A2/SCK | A3/MISO | A4/MOSI | A5/TX | A6/RX | A7 | Qwiic / Tessel | Qwiic / Tessel | Qwiic / Tessel | 3.3V I2C Ports | 3.3V I2C Ports | 3.3V I2C Ports